# Altium PCB lora1262m.PcbDoc
Units mm, origin at the board's own origin, x right, y up, seen from the top; angles counter-clockwise.
Board outline 50 x 57 mm, 2 copper layers (Top Layer, Bottom Layer); 13 components, 16 nets, 60 pads, 76 vias.
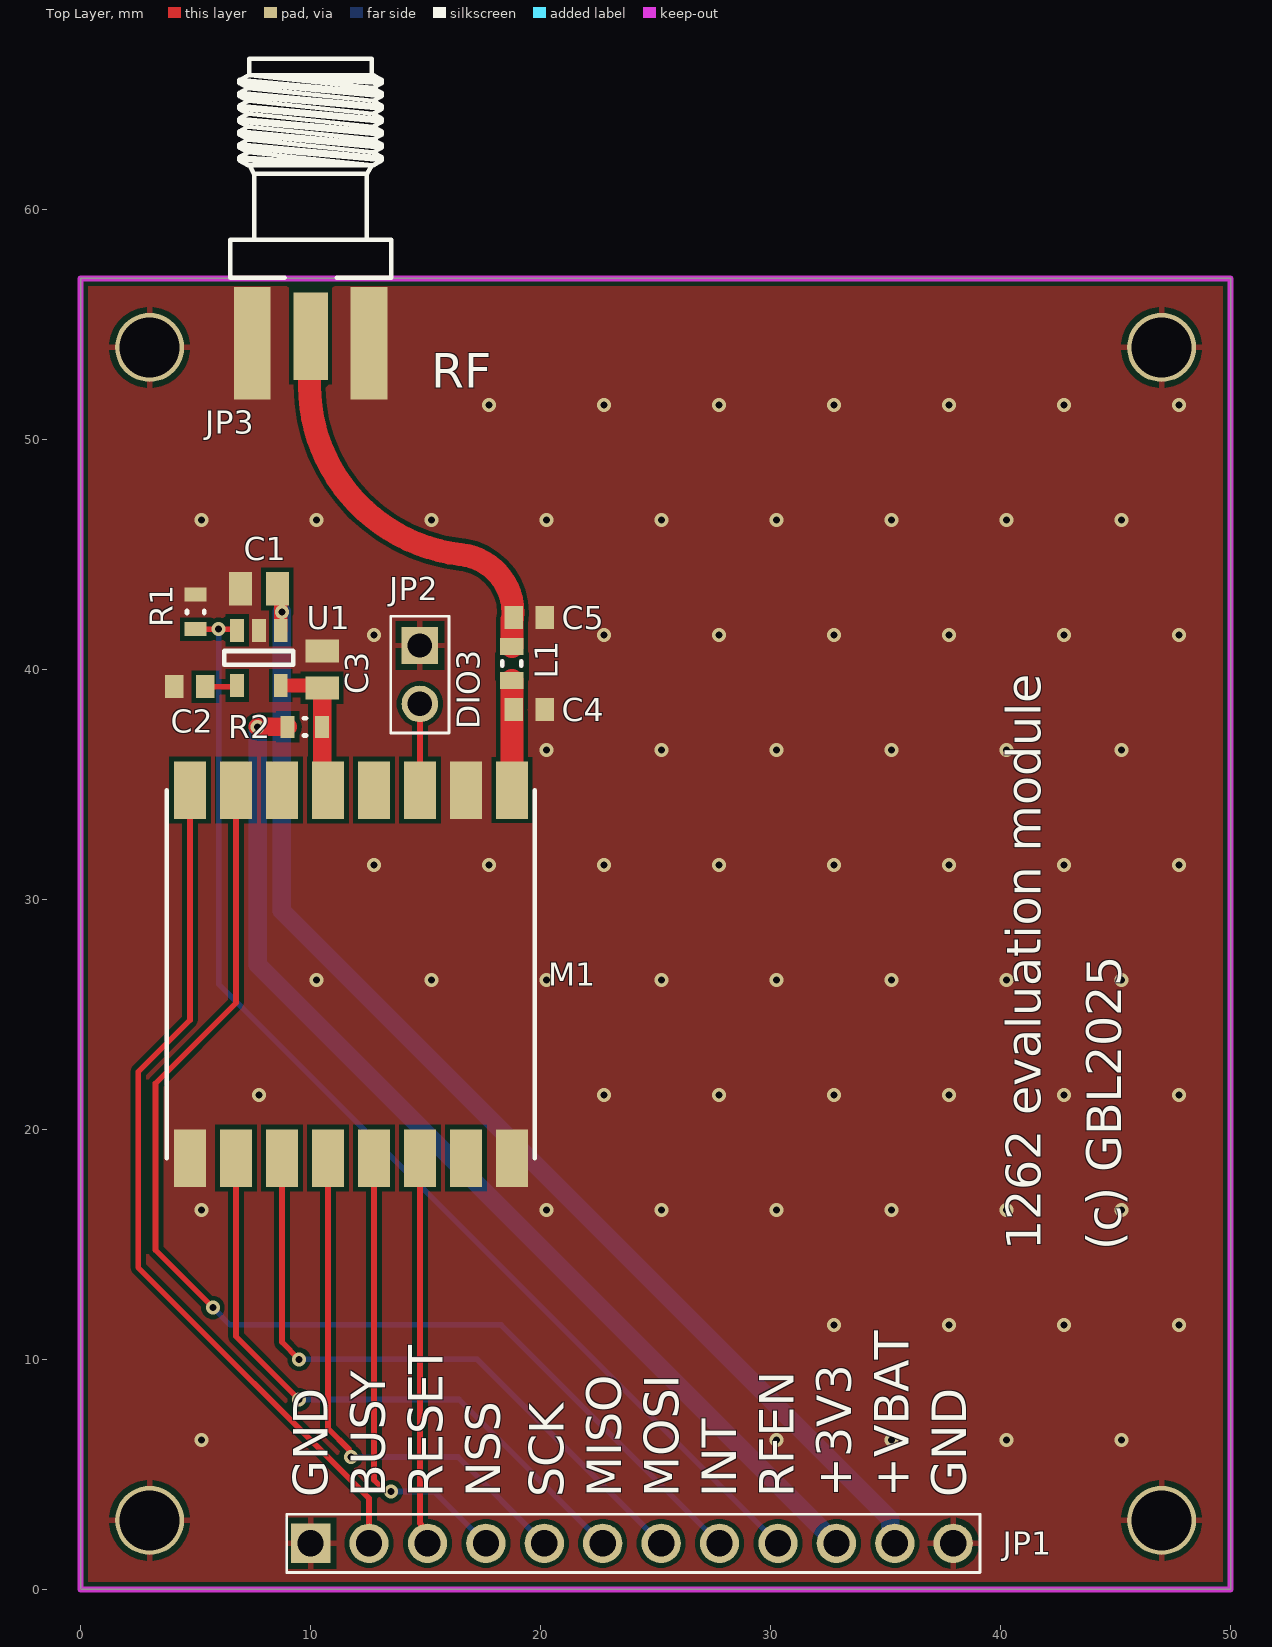
[diagram p0: Top Layer view]
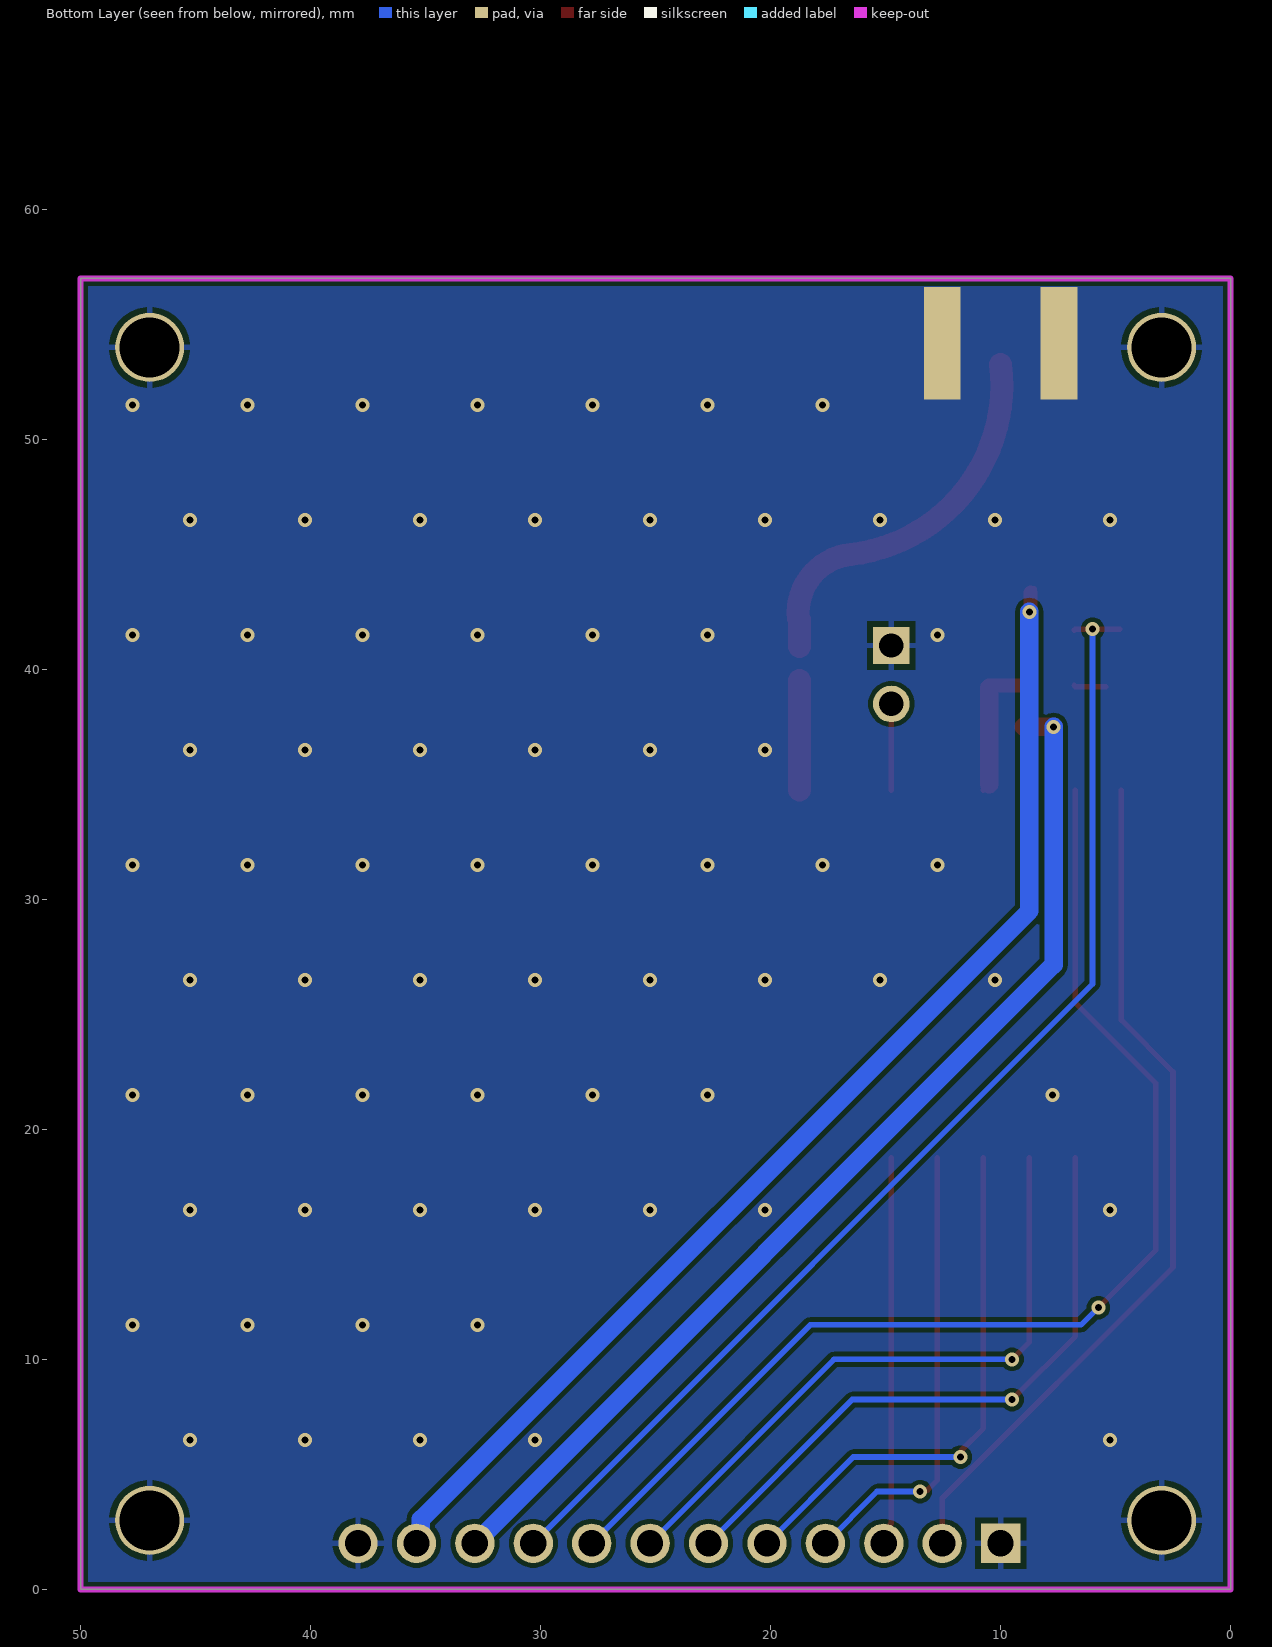
[diagram p1: Bottom Layer view, seen from below]
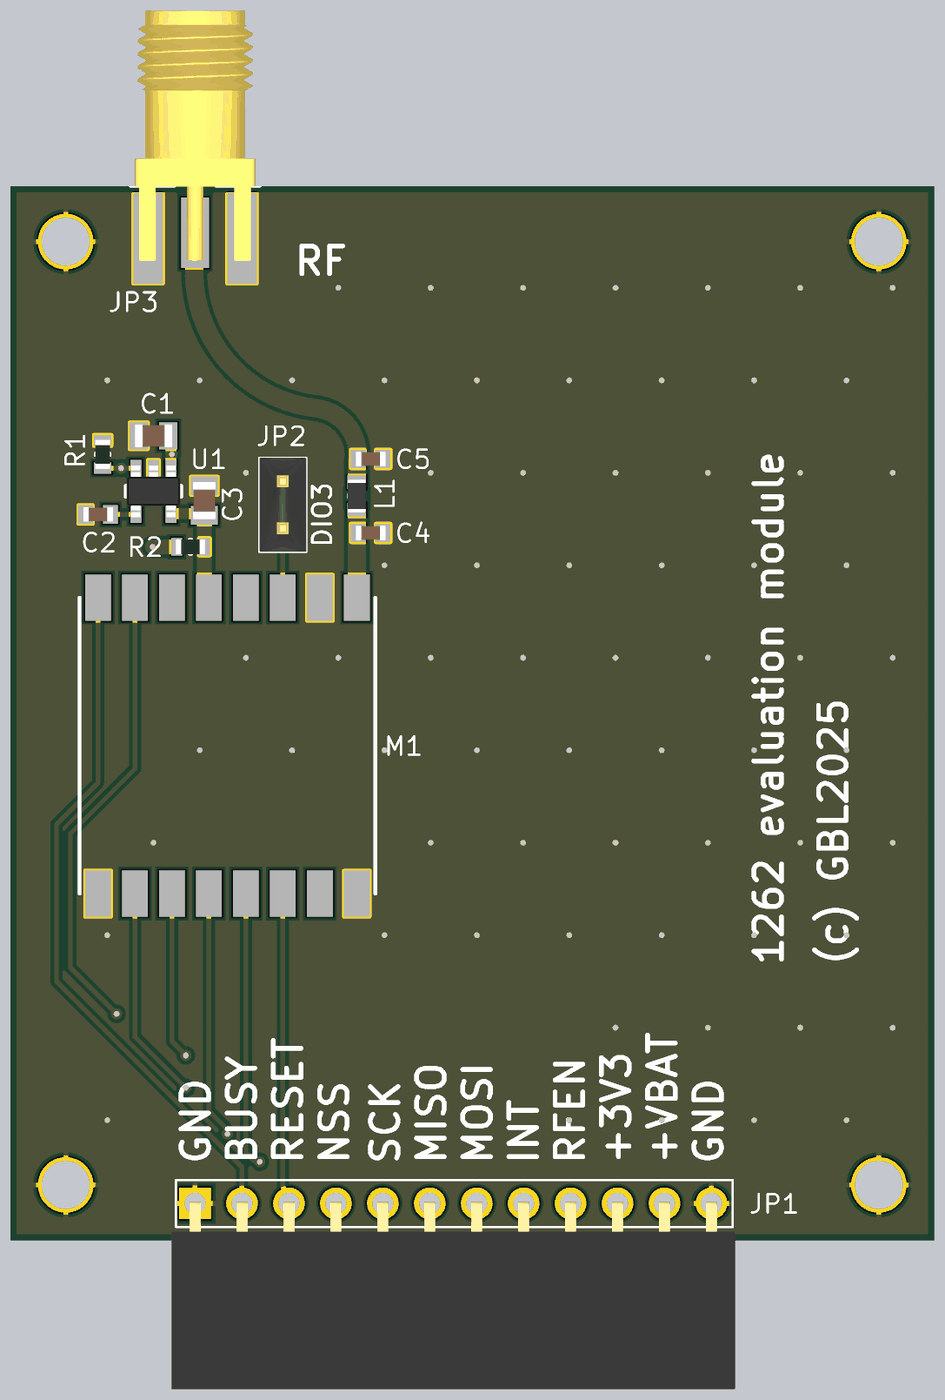
[diagram p2: 3D render of the assembled board from above, using the file's embedded part models]

## Layer stack, top to bottom
Top Solder: solder mask 0.0102, Solder Resist, Dk 3.5
Top Layer: signal copper 0.0356
Dielectric 1: dielectric 0.32, FR-4, Dk 4.8
Bottom Layer: signal copper 0.0356
Bottom Solder: solder mask 0.0102, Solder Resist, Dk 3.5

## Board outline
0,0 50,0 50,57 0,57

## Design rules (kind name [scope] priority, off if disabled: settings)
Clearance [All] p1: gap=0.2 ignorepadtopadclearanceinfootprint=FALSE
HoleSize [All] p1: absolutevalues=TRUE maxlimit=5 minlimit=0.025 maxpercent=80.000 minpercent=20.000
MinimumSolderMaskSliver [All] p1: minsoldermaskwidth=0.05
PolygonConnect PolygonConnect_1 [All vs IsNamedPolygon('GND_L01_P000') Or IsNamedPolygon('GND_L02_P001')] p1: thpad.connectstyle=Relief thpad.reliefconductorwidth=0.254 thpad.reliefentries=4 thpad.polygonreliefangle="90 Angle" thpad.airgapwidth=0.254 smdpad.connectstyle=Direct smdpad.reliefconductorwidth=0.254 smdpad.reliefentries=4 smdpad.polygonreliefangle="90 Angle" smdpad.airgapwidth=0.254 via.connectstyle=Direct via.reliefconductorwidth=0.254 via.reliefentries=4 via.polygonreliefangle="90 Angle" via.airgapwidth=0.254
PolygonConnect [All] p2: connectstyle=Relief reliefconductorwidth=0.254 reliefentries=4 polygonreliefangle="90 Angle" airgapwidth=0.254
RoutingVias [All] p1: holewidth=0.711 width=1.27 viastyle="Through Hole" minholewidth=0.711 minwidth=1.27 maxholewidth=0.711 maxwidth=1.27
SilkToSilkClearance [All] p1: silktosilkclearance=0.1
SilkToSolderMaskClearance [IsPad] p1: minsilkscreentomaskgap=0.1 clearancetoexposedcopper=TRUE
SolderMaskExpansion [All] p1: expansion=0.102 istentingtop=FALSE
Width [All] p1: maxlimit=2 minlimit=0.2 preferedwidth=0.25
26 further rules are at their usual default settings.

## Components (designator, comment, footprint, x,y, rotation, side; value= is the part's Value field where it differs from the comment)
C1 "CAPN" C-0805 7.75,43.5 r180 top
C2 "CAPN" C-0603 4.75,39.25 r180 top
C3 "CAPN" C-0805 10.5,40 r90 top
C4 "CAPN" C-0603 19.5,38.25 r0 top
C5 "CAPN" C-0603 19.5,42.25 r0 top
JP1 "CON12" PBS1-12R 10,2 r0 top locked
JP2 "HEADER 2" PLS1-2 14.75,41.04 r270 top
JP3 "EM-SA071-GGT" SMA_F_EDGE 10,55.75 r270 top
L1 "L" L-0603 18.75,40.25 r90 top
M1 "LORA1262" LGA16_LORA1280 11.75,26.75 r90 top
R1 "RES" R-0603 5,42.5 r270 top
R2 "RES" R-0603 9.75,37.5 r180 top
U1 "LP5907MFX-3.0" SOT-23-5 7.75,40.5 r270 top

## Footprints (in the part's own frame and the unit in brackets; to place one, negate y for a bottom-side part, rotate by r counter-clockwise, add the part's x,y. Pads: shape width x height; smd on the part's side, far side on the other; paste and mask are expansions set on the pad)
C-0603 [mm] "Chip Capacitor, 2-Leads, Body 1,60x0,80mm, IPC Medium Density"
  rect 0.8x1 smd: 1(-0.675,0) 2(0.675,0)
  body extent -0.8,-0.4 0.8,0.4, height 0.8
C-0805 [mm] "Chip Capacitor, 2-Leads, Body 2,00x1,25mm, IPC Medium Density"
  rect 1x1.45 smd: 1(-0.8,0) 2(0.8,0)
  body extent -1,-0.62 1,0.63, height 1.25
L-0603 [mm] "Chip Inductor, 2-Leads, Body 1,60x0,80mm, IPC Medium Density"
  rect 0.74x1.02 smd: 1(-0.735,0) 2(0.735,0)
  silkscreen extent -0.1,-0.41 0.1,0.41, body extent -0.9,-0.5 0.9,0.5, height 1
LGA16_LORA1280 [mm]
  rect 2.5x1.4 smd: 1(-8,7) 2(-8,5) 3(-8,3) 4(-8,1) 5(-8,-1) 6(-8,-3) 7(-8,-5) 8(-8,-7) 9(8,-7) 10(8,-5) 11(8,-3) 12(8,-1) 13(8,1) 14(8,3) 15(8,5) 16(8,7)
  silkscreen extent -8,-8 8,8, body extent -7.5,-7.51 7.5,7.51, height 1.5
PBS1-12R [mm] "Header, Vertical, 2.54 mm pitch; 0.70 mm lead width, 10 pins, 1 row, 10 pins per row, 24.13 mm L X 2.54 mm W X 7.54 mm H body"
  rect 1.71x1.71 hole 1.14 paste-1.71: 1(0,0)
  round 1.71 hole 1.14 paste-1.71: 2(2.54,0) 3(5.08,0) 4(7.62,0) 5(10.16,0) 6(12.7,0) 7(15.24,0) 8(17.78,0) 9(20.32,0) 10(22.86,0) 11(25.4,0) 12(27.94,0)
  silkscreen extent -1.04,-1.27 29.1,1.27, body extent -1.27,-10.03 29.21,0.1, height 2.54
PLS1-2 [mm] "Header, Vertical, 2.54 mm pitch; 0.64 mm lead width, 2 pins, 1 row, 2 pins per row, 5.08 mm L X 2.54 mm W X 8.54 mm H body"
  rect 1.59x1.59 hole 1.06 paste-1.59: 1(0,0)
  round 1.59 hole 1.06 paste-1.59: 2(2.54,0)
  silkscreen extent -1.27,-1.27 3.81,1.27, body extent -1.27,-1.27 3.81,1.27, height 8.54
R-0603 [mm] "Chip Resistor, 2-Leads, Body 1,60x0,82mm, IPC Medium Density"
  rect 0.6x0.95 smd: 1(-0.75,0) 2(0.75,0)
  silkscreen extent -0.05,-0.38 0.05,0.38, body extent -0.8,-0.4 0.8,0.4, height 0.45
SMA_F_EDGE [mm] "SMA End Launch Jack for 1.58mm PCB, 50 Ohm, Flat Tab Contact"
  rect 3.81x1.5 smd: 1(1.27,0)
  rect 4.9x1.6 smd: 2(1.575,2.54) 2(1.575,-2.54)
  rect 4.9x1.6 smd far side: 2(1.575,2.54) 2(1.575,-2.54)
  silkscreen extent -10.81,-3.5 -1.28,3.5, body extent -10.73,-3.25 2.77,3.25, height 3.7
SOT-23-5 [mm] "SOT23, 5-Leads, Body 2,90x2,45mm, Pitch 0,95mm, IPC Medium Density"
  rect 1x0.6 smd: 1(-1.2,0.95) 2(-1.2,0) 3(-1.2,-0.95) 4(1.2,-0.95) 5(1.2,0.95)
  silkscreen extent -0.3,-1.5 0.3,1.5, body extent -1.4,-1.45 1.4,1.45, height 1.55

## Part data
C1 C2 C3 C4 C5: Voltage=50V, Вид=Конденсатор, Точність/група=NP0
JP1: "Connector", Вид=Роз'єм
JP3: library part SMA, "SMA Female R/A PCB Mount", Вид=Роз'єм
U1: library part LP5907, "250mA Low-Dropout Regulator", Вид=Мікросхема
JP2: Вид=Роз'єм
L1: Вид=Індуктивність
R1 R2: Вид=Резистор, Точність/група=5%

## Free pads (board coordinates)
  round 3 hole 2.6: 1(3,3) 1(3,54) 1(47,3) 1(47,54)

## Via types
v1: diameter 0.6, hole 0.3, Top Layer to Bottom Layer, tented both sides, 76 vias

## Nets (pads, with @x,y where several pads share a name; then routed paths per layer and width w, separated by ;. In a path a pad name is that pad's centre, name@x,y a point inside that pad or via, vN(x,y) a via of type N, cw(c..) or ccw(c..) an arc to the next point about the centre after c; other vN are vias at no path point)
GND: C1.2 C2.2 C3.2 C4.2 C5.2 JP1.1 JP1.12 JP2.1 JP3.2 M1.1 M1.8 M1.10 pad.1 R1.1 U1.2
  other v1: 5.25,6.5 30.25,6.5 35.25,6.5 40.25,6.5 45.25,6.5 32.75,11.5 37.75,11.5 42.75,11.5 47.75,11.5 5.25,16.5 20.25,16.5 25.25,16.5 30.25,16.5 35.25,16.5 40.25,16.5 45.25,16.5 7.75,21.5 22.75,21.5 27.75,21.5 32.75,21.5 37.75,21.5 42.75,21.5 47.75,21.5 10.25,26.5 15.25,26.5 20.25,26.5 25.25,26.5 30.25,26.5 35.25,26.5 40.25,26.5 45.25,26.5 12.75,31.5 17.75,31.5 22.75,31.5 27.75,31.5 32.75,31.5 37.75,31.5 42.75,31.5 47.75,31.5 20.25,36.5 25.25,36.5 30.25,36.5 35.25,36.5 40.25,36.5 45.25,36.5 12.75,41.5 22.75,41.5 27.75,41.5 32.75,41.5 37.75,41.5 42.75,41.5 47.75,41.5 5.25,46.5 10.25,46.5 15.25,46.5 20.25,46.5 25.25,46.5 30.25,46.5 35.25,46.5 40.25,46.5 45.25,46.5 17.75,51.5 22.75,51.5 27.75,51.5 32.75,51.5 37.75,51.5 42.75,51.5 47.75,51.5
MISO: JP1.6 M1.2 | length 27.4
  Top Layer w0.25: M1.2 6.75,11 v1(9.5,8.25)
  Bottom Layer w0.25: v1(9.5,8.25) 16.45,8.25 JP1.6
MOSI: JP1.7 M1.3 | length 28.1
  Top Layer w0.25: M1.3 8.75,10.75 v1(9.5,10)
  Bottom Layer w0.25: v1(9.5,10) 17.24,10 JP1.7
NetC2_1: C2.1 U1.4 | length 1.4
  Top Layer w0.25: C2.1 6.75,39.25 U1.4
NetC3_1: C3.1 M1.13 R2.1 U1.5 | length 6.4
  Top Layer w0.25: C3.1@10.4,39.3 C3.1 ; M1.13@10.5,35 M1.13
  Top Layer w0.6: U1.5 C3.1@10.4,39.3
  Top Layer w0.8: M1.13@10.5,35 R2.1 C3.1
NetC4_1: C4.1 L1.1 M1.9 | length 4.8
  Top Layer w0.25: C4.1@18.75,38.175 C4.1 C4.1@18.75,38.325
  Top Layer w1: M1.9 C4.1@18.75,38.175 ; C4.1@18.75,38.325 L1.1
NetC5_1: C5.1 JP3.1 L1.2 | length 17
  Top Layer w0.25: C5.1@18.75,42.175 C5.1
  Top Layer w1: JP3.1@10,53.25 ccw(c17.375,52.375) 16.5,45 cw(c16.25,42.462) C5.1@18.788,42.213 ; L1.2 C5.1@18.75,42.175
NetJP2_2: JP2.2 M1.11 | length 3.8
  Top Layer w0.25: M1.11 JP2.2
RF_BUSY: JP1.2 M1.16 | length 37.8
  Top Layer w0.25: M1.16 4.75,24.75 2.5,22.5 2.5,14 12.54,3.96 JP1.2
RF_CS: JP1.4 M1.5 | length 20
  Top Layer w0.25: M1.5 12.75,4.75 13.183,4.317 13.433,4.317 v1(13.5,4.25)
  Bottom Layer w0.25: v1(13.5,4.25) 15.37,4.25 JP1.4
RF_EN: JP1.9 R1.2 U1.3 | length 51.8
  Top Layer w0.25: R1.2@4.825,41.75 R1.2 v1(6,41.75) 6.75,41.75 U1.3
  Bottom Layer w0.25: v1(6,41.75) 6,26.32 JP1.9
RF_INT: JP1.8 M1.15 | length 51.3
  Top Layer w0.25: v1(5.75,12.25) 3.25,14.75 3.25,22 6.75,25.5 M1.15
  Bottom Layer w0.25: v1(5.75,12.25) 6.5,11.5 18.28,11.5 JP1.8
RF_RST: JP1.3 M1.6 | length 16.9
  Top Layer w0.25: M1.6 14.75,2.876 14.801,2.826 14.801,2.279 JP1.3
SCK: JP1.5 M1.4 | length 23.4
  Top Layer w0.25: M1.4 10.75,7 11.683,6.067 11.683,5.817 v1(11.75,5.75)
  Bottom Layer w0.25: v1(11.75,5.75) 16.41,5.75 JP1.5
V_BATT: C1.1 JP1.11 U1.1 | length 53.4
  Top Layer w0.25: C1.1 C1.1@8.7,43.35
  Top Layer w0.6: U1.1 C1.1@8.7,43.35
  Bottom Layer w0.25: JP1.11@35.205,2.195 JP1.11
  Bottom Layer w0.8: v1(8.75,42.5) 8.75,29.5 35.205,3.045 JP1.11@35.205,2.195
VCC: JP1.10 R2.2 | length 47.2
  Top Layer w0.8: v1(7.696,37.5) R2.2
  Bottom Layer w0.8: v1(7.696,37.5) 7.696,27.164 JP1.10
pads on no net: M1.7 M1.12 M1.14

## Polygon pours and split planes (outlines as drawn)
GND on Top Layer "GND_L01_P000" (solid, remove dead copper, pour order 0): 0,0 50,0 50,57 0,57
GND on Bottom Layer "GND_L02_P001" (solid, remove dead copper, pour order 1): 0,0 50,0 50,57 0,57

## Keep-outs
Keep-Out Layer:
  the board outline again, w0.254

## Other copper
Top Layer:
  pour cut-out: 18,40.75 18,39.5 19.5,39.5 19.5,40.75

## Silkscreen, mask and mechanical layers (free items; w line width, h text height)
Top Overlay:
  text "RF" at 15.254,52.254 h1.5
  text "DIO3" at 17.35,37.4 h1 r90
  text "1262 evaluation module" at 41.746,14.754 h1.5 r90
  text "(c) GBL2025" at 45.246,14.754 h1.5 r90
  text "GND" at 10.746,4.004 h1.5 r90
  text "BUSY" at 13.246,4.004 h1.5 r90
  text "RESET" at 15.746,4.004 h1.5 r90
  text "NSS" at 18.246,4.004 h1.5 r90
  text "SCK" at 20.996,4.004 h1.5 r90
  text "MISO" at 23.496,4.004 h1.5 r90
  text "MOSI" at 25.996,4.004 h1.5 r90
  text "INT" at 28.496,4.004 h1.5 r90
  text "RFEN" at 30.996,4.004 h1.5 r90
  text "+3V3" at 33.496,4.004 h1.5 r90
  text "+VBAT" at 35.996,4.004 h1.5 r90
  text "GND" at 38.496,4.004 h1.5 r90